# Altium PCB PCB.PcbDoc
Units mil, origin at the board's own origin, x right, y up, seen from the top; angles counter-clockwise.
Board outline 3700 x 3940 mil, 4 copper layers (Top Layer, Signal Layer 1, Signal Layer 2, Bottom Layer), stack 30.634 mil thick; 58 components, 40 nets, 306 pads, 93 vias.
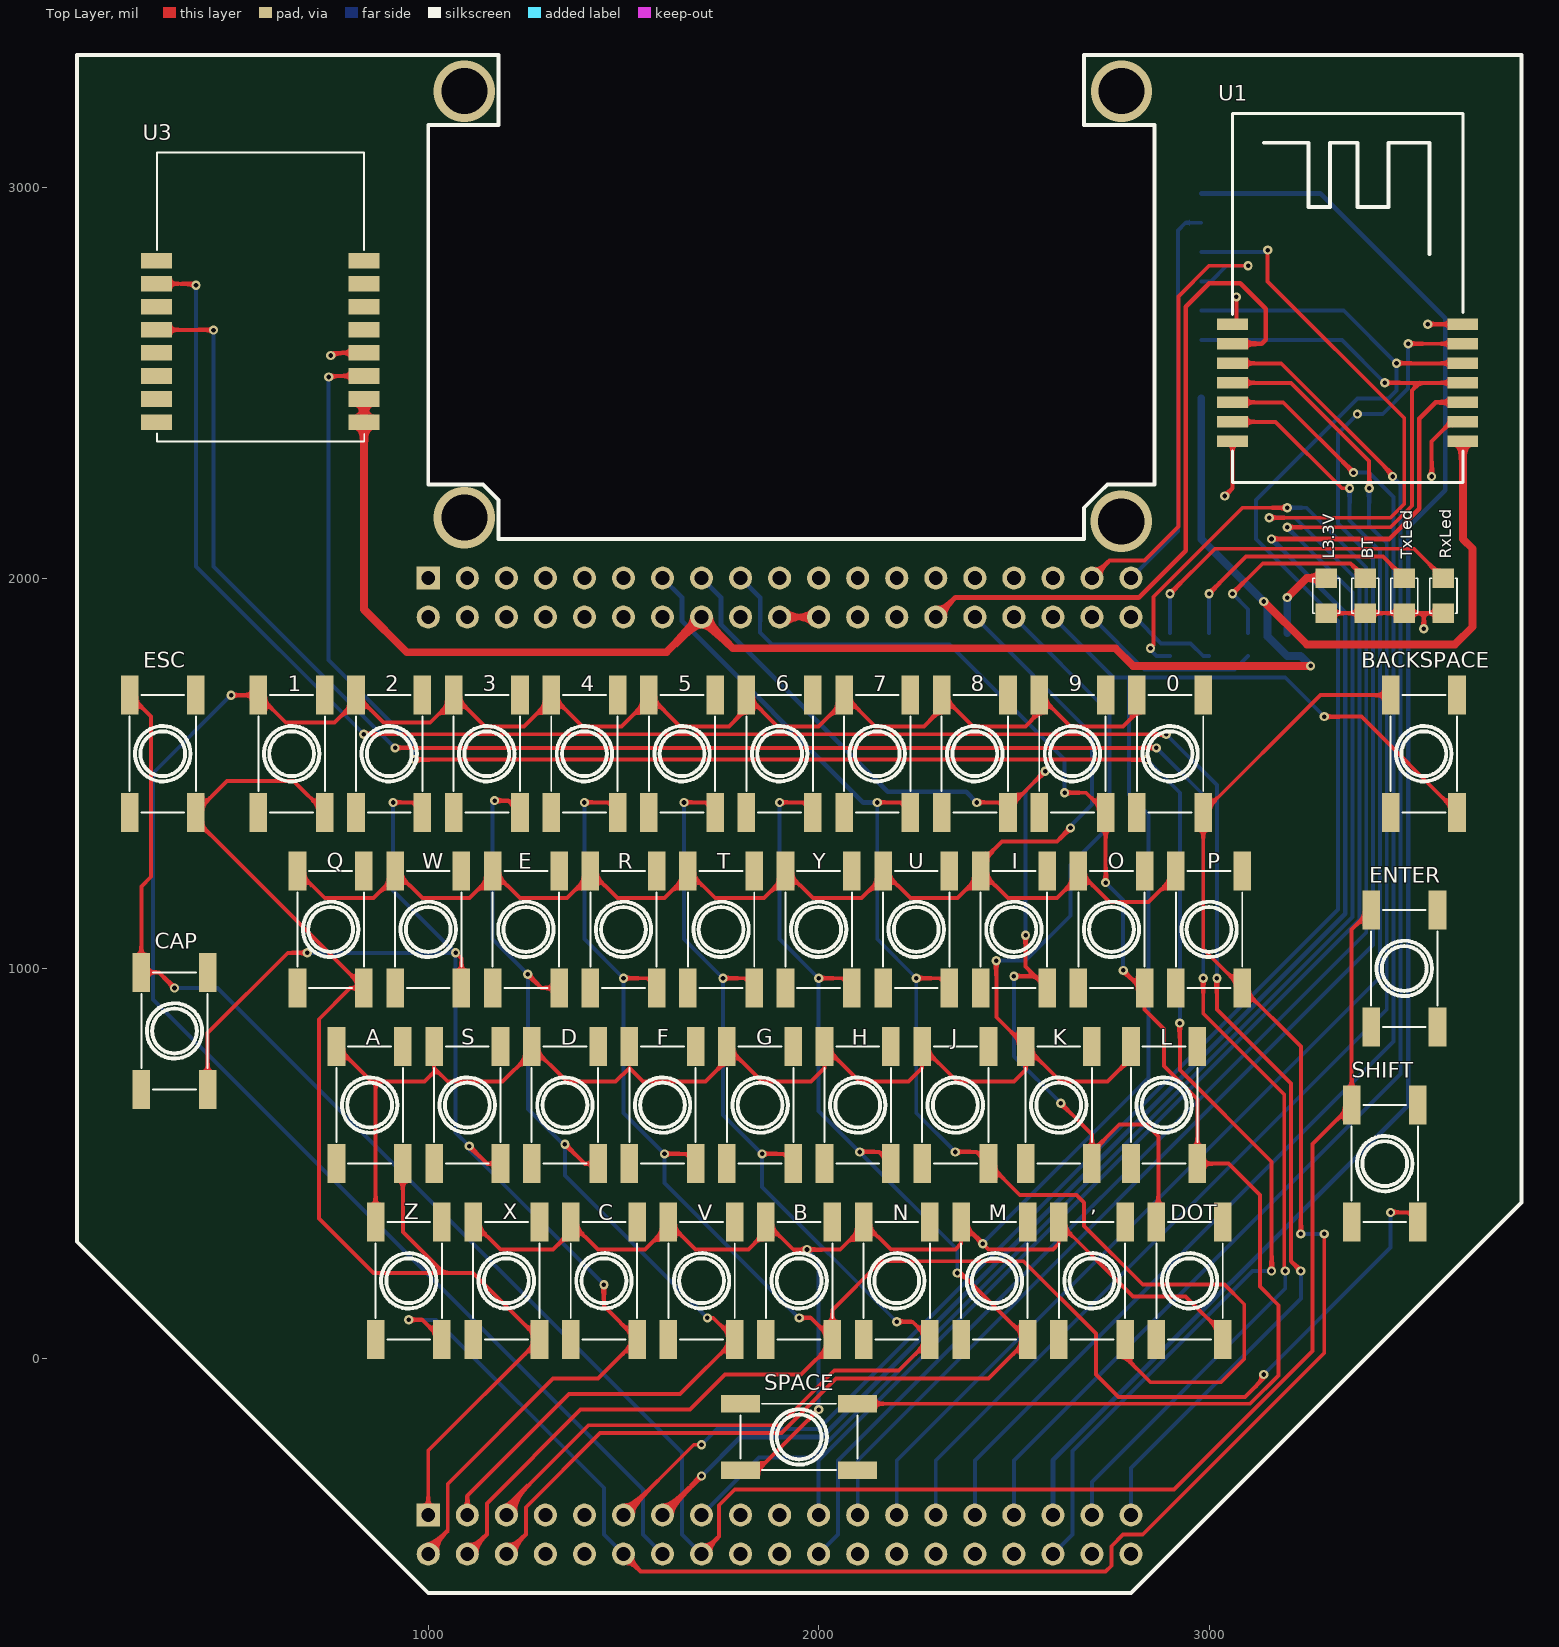
[diagram p0: Top Layer view]
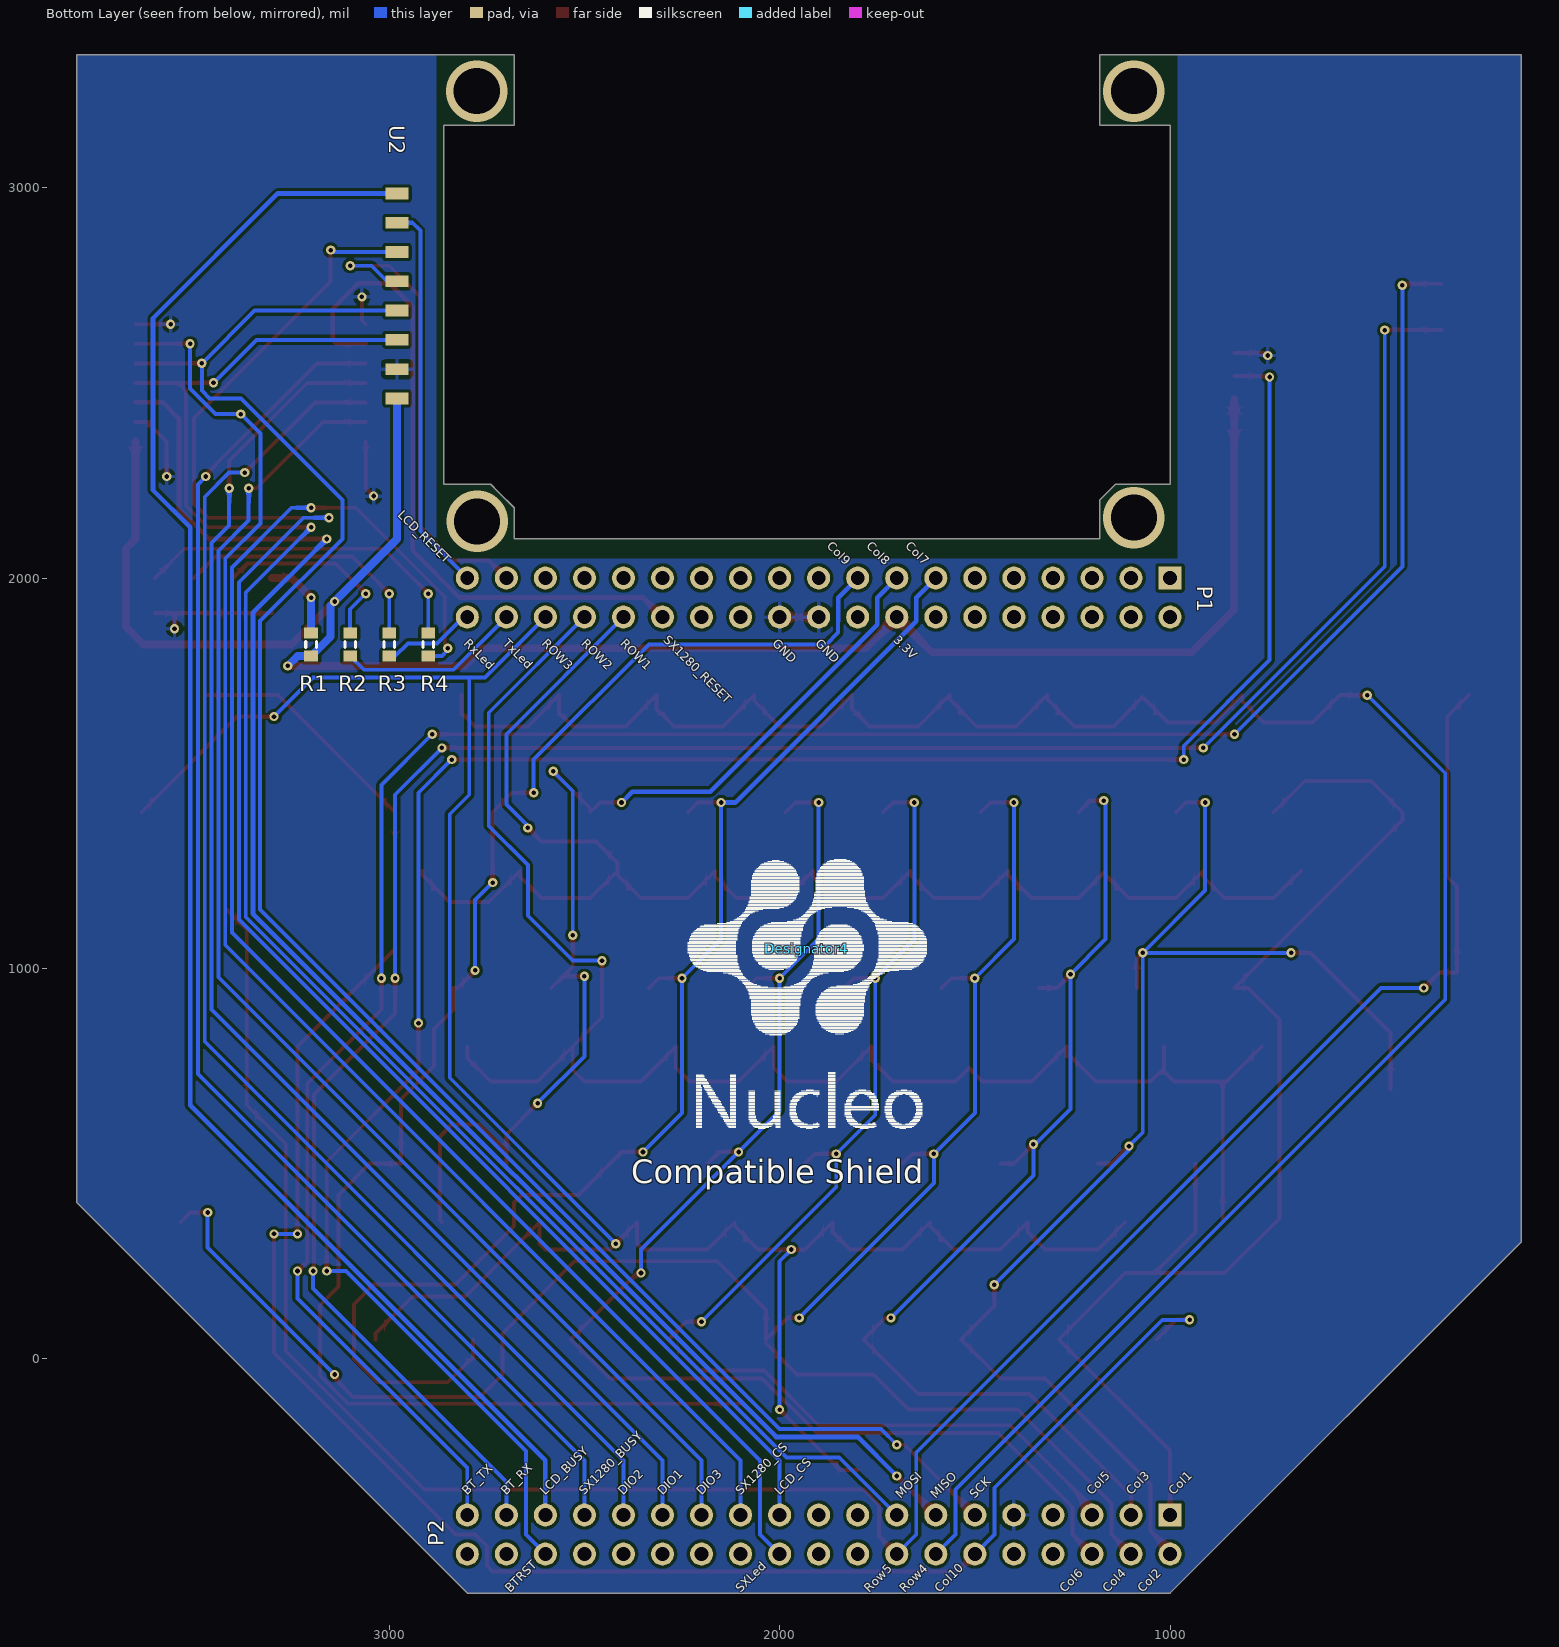
[diagram p1: Bottom Layer view, seen from below]

## Layer stack, top to bottom
Top Solder: solder mask 0.4, Solder Resist, Dk 3.5
Top Layer: signal copper 1.4
Dielectric 1: core 10, FR-4, Dk 4.2
Signal Layer 1: signal copper 1.417
Dielectric 3: prepreg 5, Dk 4.2
Signal Layer 2: signal copper 1.417
Dielectric 2: core 10, Dk 4.2
Bottom Layer: signal copper 1.4
Bottom Solder: solder mask 0.4, Solder Resist, Dk 3.5

## Board outline
100,300 1000,-600 2800,-600 3800,400 3800,3340 2680,3340 2680,3160 2860,3160 2860,2240 2740,2240 2720,2220 2680,2180 2680,2100 1180,2100 1180,2200 1140,2240 1000,2240 1000,3160 1180,3160 1180,3340 100,3340

## Design rules (kind name [scope] priority, off if disabled: settings)
Clearance [All] p1: gap=7.5 ignorepadtopadclearanceinfootprint=FALSE except(0: Arc-Hole Track-Hole SMDPad-Hole THPad-Hole Via-Hole Fill-Hole Poly-Hole Region-Hole Text-Hole)
PolygonConnect [All] p1: connectstyle=Relief reliefconductorwidth=10 reliefentries=4 polygonreliefangle="90 Angle" airgapwidth=10
RoutingVias [All] p1: holewidth=11.81 width=50 viastyle="Through Hole" minholewidth=11.81 minwidth=17.72 maxholewidth=11.81 maxwidth=23.62
SolderMaskExpansion [All] p1: expansion=4
Width [All] p1: maxlimit=30 minlimit=8 preferedwidth=10 minimp=50.000000 maximp=50.000000 favimp=50.000000
30 further rules are at their usual default settings.

## Components (designator, comment, footprint, x,y, rotation, side; value= is the part's Value field where it differs from the comment)
0 "SW" "Button 4 pins" 2900,1550 r90 top value="Button chip 4 pin"
1 "SW" "Button 4 pins" 650,1550 r90 top value="Button chip 4 pin"
2 "SW" "Button 4 pins" 900,1550 r90 top value="Button chip 4 pin"
3 "SW" "Button 4 pins" 1150,1550 r90 top value="Button chip 4 pin"
4 "SW" "Button 4 pins" 1400,1550 r90 top value="Button chip 4 pin"
5 "SW" "Button 4 pins" 1650,1550 r90 top value="Button chip 4 pin"
6 "SW" "Button 4 pins" 1900,1550 r90 top value="Button chip 4 pin"
7 "SW" "Button 4 pins" 2150,1550 r90 top value="Button chip 4 pin"
8 "SW" "Button 4 pins" 2400,1550 r90 top value="Button chip 4 pin"
9 "SW" "Button 4 pins" 2650,1550 r90 top value="Button chip 4 pin"
, "SW" "Button 4 pins" 2700,200 r90 top value="Button chip 4 pin"
A "SW" "Button 4 pins" 850,650 r90 top value="Button chip 4 pin"
B "SW" "Button 4 pins" 1950,200 r90 top value="Button chip 4 pin"
BACKSPACE "SW" "Button 4 pins" 3550,1550 r270 top value="Button chip 4 pin"
BT "LED SMD" SM-LED-0805-Blue 3400,2000 r270 top
C "SW" "Button 4 pins" 1450,200 r90 top value="Button chip 4 pin"
CAP "SW" "Button 4 pins" 350,840 r90 top value="Button chip 4 pin"
D "SW" "Button 4 pins" 1350,650 r90 top value="Button chip 4 pin"
Designator4 "Comment" "NUCLEO_black 2cm" 1930,1050 r180 bottom
DOT "SW" "Button 4 pins" 2950,200 r270 top value="Button chip 4 pin"
E "SW" "Button 4 pins" 1250,1100 r90 top value="Button chip 4 pin"
ENTER "SW" "Button 4 pins" 3500,1000 r90 top value="Button chip 4 pin"
ESC "SW" "Button 4 pins" 320,1550 r90 top value="Button chip 4 pin"
F "SW" "Button 4 pins" 1600,650 r90 top value="Button chip 4 pin"
G "SW" "Button 4 pins" 1850,650 r90 top value="Button chip 4 pin"
H "SW" "Button 4 pins" 2100,650 r90 top value="Button chip 4 pin"
I "SW" "Button 4 pins" 2500,1100 r90 top value="Button chip 4 pin"
J "SW" "Button 4 pins" 2350,650 r90 top value="Button chip 4 pin"
K "SW" "Button 4 pins" 2615,650 r90 top value="Button chip 4 pin"
L "SW" "Button 4 pins" 2885,650 r90 top value="Button chip 4 pin"
L3.3V "LED SMD" SM-LED-0805-Blue 3300,2000 r270 top
M "SW" "Button 4 pins" 2450,200 r90 top value="Button chip 4 pin"
N "SW" "Button 4 pins" 2200,200 r90 top value="Button chip 4 pin"
O "SW" "Button 4 pins" 2750,1100 r90 top value="Button chip 4 pin"
P "SW" "Button 4 pins" 3000,1100 r90 top value="Button chip 4 pin"
P1 "Header 19X2" HDR2X19 1000,2000 r0 bottom
P2 "Header 19X2" HDR2X19 1000,-400 r0 bottom
Q "SW" "Button 4 pins" 750,1100 r90 top value="Button chip 4 pin"
R "SW" "Button 4 pins" 1500,1100 r90 top value="Button chip 4 pin"
R1 "Res3" J1-0603 3200,1830 r270 bottom value=330
R2 "Res3" J1-0603 3100,1829.53 r270 bottom value=330
R3 "Res3" J1-0603 3000,1829.53 r270 bottom value=330
R4 "Res3" J1-0603 2900,1829.53 r270 bottom value=330
RxLed "LED SMD" SM-LED-0805-Blue 3600,2000 r270 top
S "SW" "Button 4 pins" 1100,650 r90 top value="Button chip 4 pin"
SHIFT "SW" "Button 4 pins" 3450,500 r90 top value="Button chip 4 pin"
SPACE "SW" "Button 4 pins" 1950,-200 r180 top value="Button chip 4 pin"
T "SW" "Button 4 pins" 1750,1100 r90 top value="Button chip 4 pin"
TxLed "LED SMD" SM-LED-0805-Blue 3500,2000 r270 top
U "SW" "Button 4 pins" 2250,1100 r90 top value="Button chip 4 pin"
U1 "SX1280 Module" "SX1280 Module" 3350,2800 r0 top
U2 "EInk LCD Module" EInk_Module 1945,2665 r0 top
U3 "Bluetooth HM-13" "Bluetooth HM-13" 560,2990 r0 top
V "SW" "Button 4 pins" 1700,200 r90 top value="Button chip 4 pin"
W "SW" "Button 4 pins" 1000,1100 r90 top value="Button chip 4 pin"
X "SW" "Button 4 pins" 1200,200 r90 top value="Button chip 4 pin"
Y "SW" "Button 4 pins" 2000,1100 r90 top value="Button chip 4 pin"
Z "SW" "Button 4 pins" 950,200 r90 top value="Button chip 4 pin"

## Footprints (in the part's own frame and the unit in brackets; to place one, negate y for a bottom-side part, rotate by r counter-clockwise, add the part's x,y. Pads: shape width x height; smd on the part's side, far side on the other; paste and mask are expansions set on the pad)
"Bluetooth HM-13" [mil]
  rect 80x40 smd: 1(-255.91,-177.17) 2(-255.91,-236.22) 3(-255.91,-295.28) 4(-255.91,-354.33) 5(-255.91,-413.39) 6(-255.91,-472.44) 7(-255.91,-531.5) 8(-255.91,-590.55) 9(275.59,-590.55) 10(275.59,-531.5) 11(275.59,-472.44) 12(275.59,-413.39) 13(275.59,-354.33) 14(275.59,-295.28) 15(275.59,-236.22) 16(275.59,-177.17)
  silkscreen extent -255,-640 276,100
"Button 4 pins" [mil]
  rect 100x45 smd: 1(-150,85) 2(150,85) 3(-150,-85) 4(150,-85)
  silkscreen extent -150,-85 150,85
EInk_Module [mil]
  rect 60x30 smd far side: 1(1035,-205) 2(1035,-130) 3(1035,-55) 4(1035,20) 5(1035,95) 6(1035,170) 7(1035,245) 8(1035,320)
HDR2X19 [mm] "Connector; Header; 19x2 Position"
  rect 1.5x1.5 hole 0.9: 1(0,0)
  round 1.5 hole 0.9: 2(0,2.54) 3(2.54,0) 4(2.54,2.54) 5(5.08,0) 6(5.08,2.54) 7(7.62,0) 8(7.62,2.54) 9(10.16,0) 10(10.16,2.54) 11(12.7,0) 12(12.7,2.54) 13(15.24,0) 14(15.24,2.54) 15(17.78,0) 16(17.78,2.54) 17(20.32,0) 18(20.32,2.54) 19(22.86,0) 20(22.86,2.54) 21(25.4,0) 22(25.4,2.54) 23(27.94,0) 24(27.94,2.54) 25(30.48,0) 26(30.48,2.54) 27(33.02,0) 28(33.02,2.54) 29(35.56,0) 30(35.56,2.54) 31(38.1,0) 32(38.1,2.54) 33(40.64,0) 34(40.64,2.54) 35(43.18,0) 36(43.18,2.54) 37(45.72,0) 38(45.72,2.54)
J1-0603 [mm] "Chip Resistor, Body 1.6x0.8mm, IPC High Density"
  rect 0.7x0.9 smd: 1(-0.75,0) 2(0.75,0)
  silkscreen extent -0.2,-0.35 0.2,0.35, body extent -0.85,-0.48 0.85,0.48, height 0.9
"NUCLEO_black 2cm" [mil]
  silkscreen extent -305,-461 307,229
SM-LED-0805-Blue [mil]
  rect 50x55 smd: 1(0,0) 2(90,0)
  silkscreen extent 0,-35 90,35, body extent 5,-25 85,25, height 43
"SX1280 Module" [mm]
  rect 2x0.75 smd: 1(-7.366,-3.81) 2(-7.366,-5.08) 3(-7.366,-6.35) 4(-7.366,-7.62) 5(-7.366,-8.89) 6(-7.366,-10.16) 7(-7.366,-11.43) 8(7.62,-11.43) 9(7.62,-10.16) 10(7.62,-8.89) 11(7.62,-7.62) 12(7.62,-6.35) 13(7.62,-5.08) 14(7.62,-3.81)
  silkscreen extent -7.37,-14.1 7.62,9.9

## Part data
0 1 2 3 4 5 6 7 8 9 , A B BACKSPACE C CAP D DOT E ENTER ESC F G H I J K L M N O P Q R S SHIFT SPACE T U V W X Y Z: library part SW4, "Switch button 4 pin"
BT L3.3V RxLed TxLed: library part LED-SMD-0805
P1 P2: "Header, 19-Pin, Dual row", LatestRevisionDate=17-Jul-2002, LatestRevisionNote="Re-released for DXP Platform.", Publisher="Altium Limited"
R1 R2 R3 R4: "Resistor", LatestRevisionDate=29-May-2009, LatestRevisionNote="IPC-7351 Footprint Added.", PackageDescription="Chip Resistor", PackageReference=J1-0603, Published=8-Jun-2000, Publisher="Altium Limited"
U2: library part "E-Ink LCD"

## Via types
v1: diameter 23.62, hole 11.81, Top Layer to Bottom Layer, 89 vias
v2: diameter 157.48, hole 118.11, Top Layer to Bottom Layer, 4 vias

## Nets (pads, with @x,y where several pads share a name; then routed paths per layer and width w, separated by ;. In a path a pad name is that pad's centre, name@x,y a point inside that pad or via, vN(x,y) a via of type N, cw(c..) or ccw(c..) an arc to the next point about the centre after c; other vN are vias at no path point)
3.3V: P1.16 R1.2 U1.8 U2.1 U3.9 U3.10 | length 5003.6
  Top Layer w20: U3.10 U3.9 835.59,1919.41 945,1810 1610,1810 P1.16 1780,1820 2760,1820 2805,1775 v1(3260,1775) ; v1(3140,1940) 3250,1830 3630,1830 3675,1875 3675,2075 3650,2100 U1.8
  Bottom Layer w20: U2.1 2980,2100 v1(3140,1940) 3150,1930 3150,1850.47 R1.2 3234.53,1800.47 v1(3260,1775)
BT_RESET: P2.34 U3.11 | length 5465.9
  Top Layer w10: v1(745,2515) 747.56,2517.56 U3.11 ; v1(965,1535) v1(2840,1535) ; v1(2925,860) 2925,740 3160,505 v1(3160,225)
  Bottom Layer w10: v1(745,2515) 745,1790 965,1570 v1(965,1535) ; P2.34 2650,-450 2650,-236.16 3111.16,225 v1(3160,225) ; v1(2840,1535) 2925,1450 v1(2925,860)
BT_RX: P2.35 U3.4 | length 5665.5
  Top Layer w10: U3.4 449.33,2635.67 v1(450,2635) ; v1(915,1565) v1(2865,1565) ; v1(2985,975) 2985,885 3192.5,677.5 3192.5,227.5 v1(3195,225)
  Bottom Layer w10: v1(450,2635) 450,2030 v1(915,1565) ; P2.35 2700,-315 3195,180 v1(3195,225) ; v1(2865,1565) 2985,1445 v1(2985,975)
BT_TX: P2.37 U3.2 | length 5808.7
  Top Layer w10: U3.2 401.22,2753.78 v1(405,2750) ; v1(835,1600) v1(2890,1600) ; v1(3020,975) 3020,895 3210,705 3210,250 v1(3235,225)
  Bottom Layer w10: v1(405,2750) 405,2030 v1(835,1600) ; P2.37 2800,-280 3235,155 v1(3235,225) ; v1(2890,1600) 3020,1470 v1(3020,975)
COL1: 1.3 A.3 ESC.3 P2.1 Q.3 X.3 | length 3267.5
  Top Layer w10: 1.3 655,1480 485,1480 ESC.3 405,1380 Q.3 800,950 720,870 720,360 860,220 1040,220 ; A.3 935,325 1040,220 ; P2.1 1000,-235 X.3 1115,220 1040,220
COL2: 2.3 C.3 CAP.3 P2.2 S.3 W.3 | length 3618
  Top Layer w10: CAP.3 435,835 640,1040 v1(690,1040) ; v1(910,1425) 960,1425 2.3 ; P2.2 1000,-490 1050,-440 1050,-320 1320,-50 1435,-50 C.3 1450,135 v1(1450,190) ; v1(1070,1040) 1085,1025 W.3 ; v1(1105,545) 1150,500 S.3
  Bottom Layer w10: v1(690,1040) v1(1070,1040) ; v1(910,1425) 910,1200 v1(1070,1040) ; v1(1450,190) 1105,535 v1(1105,545) 1070,580 v1(1070,1040)
COL3: 3.3 D.3 E.3 P2.3 V.3 | length 2828.9
  Top Layer w10: P2.3 1100,-350 1360,-90 1645,-90 V.3 1730,105 v1(1715,105) ; v1(1170,1430) 1205,1430 3.3 ; v1(1255,985) 1290,950 E.3 ; v1(1350,550) 1400,500 D.3
  Bottom Layer w10: v1(1170,1430) 1165,1425 1165,1075 v1(1255,985) 1255,640 1345,550 v1(1350,550) 1350,470 v1(1715,105)
COL4: 4.3 B.3 F.3 P2.4 R.3 SHIFT.3 | length 5239.1
  Top Layer w10: P2.4 1150,-450 1150,-370 1390,-130 1670,-130 1760,-40 1955,-40 B.3@2035,40 ; v1(1400,1425) 1460,1425 4.3 ; v1(1500,975) 1560,975 R.3 ; v1(1605,525) 1660,525 F.3 ; v1(1950,105) 1980,105 B.3 2035,125 2160,250 2525,250 2710,65 2710,-40 2767.5,-97.5 3092.5,-97.5 3140,-50 v1(3140,-40) ; v1(3465,375) 3510,375 SHIFT.3
  Bottom Layer w10: v1(1400,1425) 1400,1075 v1(1500,975) 1500,630 v1(1605,525) 1605,450 v1(1950,105) ; v1(3140,-40) 3465,285 v1(3465,375)
COL5: 5.3 G.3 N.3 P2.5 T.3 | length 3213.6
  Top Layer w10: P2.5 1200,-380 1410,-170 1900,-170 2040,-30 2205,-30 N.3 2240,95 v1(2200,95) ; v1(1655,1425) 1710,1425 5.3 ; v1(1755,975) 1810,975 T.3 ; v1(1855,525) 1910,525 G.3
  Bottom Layer w10: v1(1655,1425) 1655,1075 v1(1755,975) 1755,625 v1(1855,525) 1855,440 v1(2200,95)
COL6: 6.3 H.3 M.3 P2.6 Y.3 | length 3530.8
  Top Layer w10: P2.6 1250,-450 1250,-380 1440,-190 1904.75,-190 2044.75,-50 2435,-50 M.3 2365,220 v1(2355,220) ; v1(1900,1425) 1960,1425 6.3 ; v1(2000,975) 2060,975 Y.3 ; v1(2105,530) 2155,530 H.3
  Bottom Layer w10: v1(1900,1425) 1900,1075 v1(2000,975) 2000,635 v1(2105,530) 2355,280 v1(2355,220)
COL7: 7.3 ,.3 J.3 P1.13 U.3 | length 3470.8
  Top Layer w10: v1(2150,1425) 2210,1425 7.3 ; v1(2250,975) 2310,975 U.3 ; v1(2350,530) 2405,530 J.3 2515,420 2660,420 2680,400 2680,340 2830,190 3040,190 3090,140 3090,0 3030,-60 2850,-60 2785,5 2785,50
  Bottom Layer w10: v1(2150,1425) 2150,1075 v1(2250,975) 2250,630 v1(2350,530)
  Bottom Layer w12: P1.13 1650,1950 1650,1889.15 2114.15,1425 v1(2150,1425)
COL8: 8.3 DOT.3 I.3 K.3 P1.15 | length 2868.8
  Top Layer w10: v1(2405,1425) 2460,1425 8.3 2485,1410.18 2579.82,1505 v1(2580,1505) ; v1(2500,980) 2555,980 ; v1(2530,1085) 2530,1005 2555,980 ; I.3 2555,980 ; v1(2620,655) 2700,575 K.3@2700,530 ; K.3 K.3@2700,530 ; DOT.3 2870,355 2870,570 2840,600 2770,600 K.3@2700,530
  Bottom Layer w10: v1(2500,980) 2500,775 v1(2620,655) ; v1(2530,1085) 2530,1455 v1(2580,1505)
  Bottom Layer w12: P1.15 1750,1950 1750,1880 2177.5,1452.5 2377.5,1452.5 v1(2405,1425)
COL9: 9.3 L.3 O.3 P1.17 SPACE.3 | length 4072.3
  Top Layer w10: SPACE.3 3105.25,-115 3177.63,-42.63 3177.63,137.37 3130,185 3130,420 3050,500 L.3 2970,665 2885,750 2885,845 2835,895 O.3 2825,950 v1(2780,995) ; v1(2630,1450) 2685,1450 9.3 v1(2735,1220)
  Bottom Layer w10: 1850,1890 1850,1860 1880,1830 2335,1830 2630,1535 v1(2630,1450) ; v1(2735,1220) 2780,1175 v1(2780,995)
  Bottom Layer w12: P1.17 1850,1950 1850,1890
COL10: 0.3 BACKSPACE.3 P2.12 P.3 Z.3 | length 5202.2
  Top Layer w10: v1(950,100) 985,100 Z.3 ; P2.12 1545,-545 2735,-545 2750,-530 2750,-480 2780,-450 2830,-450 3295,15 v1(3295,320) ; v1(3235,320) 3235,800 P.3 2985,1050 0.3 3285,1700 BACKSPACE.3
  Bottom Layer w10: v1(950,100) 1020,100 1450,-330 1450,-450 P2.12 ; v1(3235,320) v1(3295,320)
DIO1: P2.27 U1.4 | length 3629.9
  Top Layer w10: U1.4 3210,2500 3410,2300 v1(3410,2230)
  Bottom Layer w10: P2.27 2300,-260 3455,895 3455,2090 3410,2135 v1(3410,2230)
DIO2: P2.29 U1.5 | length 3564.7
  Top Layer w10: U1.5 3190,2450 v1(3370,2270)
  Bottom Layer w10: P2.29 2400,-260 3472.5,812.5 3472.5,2207.5 3410,2270 v1(3370,2270)
DIO3: P2.25 U1.6 | length 3545.1
  Top Layer w10: U1.6 3170,2400 3340,2230 v1(3360,2230)
  Bottom Layer w10: P2.25 2200,-260 3437.5,977.5 3437.5,2070 3360,2147.5 v1(3360,2230)
GND: BT.2 L3.3V.2 P1.20 P1.22 P2.9 RxLed.2 TxLed.2 U1.1 U1.7 U1.9 U1.14 U2.2 U3.12 | length 1031.5
  Top Layer w10: v1(750,2570) 756.61,2576.61 U3.12 ; P1.20 P1.22 ; v1(3040,2210) 3060,2230 U1.7 ; U1.1 3070,2660 v1(3070,2720) ; L3.3V.2 BT.2 TxLed.2 3550,1910 ; v1(3550,1870) 3550,1910 ; v1(3560,2650) U1.14 ; v1(3570,2260) 3570,2350 3620,2400 U1.9 ; RxLed.2 3550,1910
LCD_BUSY: P2.33 U2.8 | length 4238.8
  Bottom Layer w12: P2.33 2600,-260 3510,650 3510,2130 3605,2225 3605,2665 3285,2985 U2.8
LCD_CE0: P1.35 U2.5 | length 1213.6
  Top Layer w10: P1.35 2745,2045 2835,2045 2921.5,2131.5 2921.5,2721.5 3000,2800 v1(3100,2800)
  Bottom Layer w10: U2.5 3005,2760 3045,2800 v1(3100,2800)
LCD_CS: P2.21 U2.6 | length 4589.5
  Top Layer w10: v1(3150,2840) 3150,2760 3500,2410 3500,2190 3464.31,2154.31 v1(3154.31,2154.31)
  Bottom Layer w10: P2.21 2000,-260 3385,1125 3385,1989.31 3220,2154.31 v1(3154.31,2154.31) ; U2.6 3145,2835 v1(3150,2840)
LCD_RESET: P1.37 U2.7 | length 1008
  Bottom Layer w10: P1.37 2920,2120 2920,2890 2940,2910 U2.7
MISO: P2.13 U1.10 | length 4195.5
  Top Layer w12: P2.13 v1(1700,-300) ; v1(3160,2100) 3460.91,2100 3538.5,2177.59 3538.5,2408.5 3580,2450 U1.10
  Bottom Layer w12: v1(1700,-300) 1800,-200 2009.09,-200 3349,1139.91 3349,1911 v1(3160,2100)
MOSI: P2.15 U1.11 U2.3 | length 4750.8
  Top Layer w10: v1(3200,2130) 3464.75,2130 3520,2185.25 3520,2480 3540,2500 ; v1(3450,2500) 3540,2500 ; U1.11 3540,2500
  Bottom Layer w10: P2.15 1847.25,-252.75 1982.5,-252.75 3367.5,1132.25 3367.5,1962.5 v1(3200,2130) ; U2.3 3340,2610 v1(3450,2500)
NetBT_1: BT.1 R2.1 | length 505.1
  Top Layer w10: v1(3060,1960) 3137.5,2037.5 3362.5,2037.5 BT.1
  Bottom Layer w10: v1(3060,1960) 3100,1920 R2.1
NetL3.3V_1: L3.3V.1 R1.1 | length 211.2
  Top Layer w20: v1(3200,1950) 3250,2000 L3.3V.1
  Bottom Layer w20: R1.1 v1(3200,1950)
NetR3_1: R3.1 TxLed.1 | length 663.1
  Top Layer w10: v1(3000,1960) 3095,2055 3445,2055 TxLed.1
  Bottom Layer w10: R3.1 v1(3000,1960)
NetR4_1: R4.1 RxLed.1 | length 879.6
  Top Layer w10: v1(2900,1960) 3015,2075 3525,2075 RxLed.1
  Bottom Layer w10: R4.1 v1(2900,1960)
ROW1: E.2 I.2 O.2 P1.30 P.2 Q.2 R.2 T.2 U.2 W.2 Y.2 | length 3819.5
  Top Layer w10: Q.2 735,1180 860,1180 915,1235 W.2 985,1180 1105.18,1180 1165,1239.82 E.2 1235,1180 1355.18,1180 1415,1239.82 R.2 1485,1180 1605.18,1180 1665,1239.82 T.2 1735,1180 1860,1180 1915,1235 Y.2 1985,1180 2110,1180 2165,1235 U.2 2235,1180 2355.18,1180 2415,1239.82 I.2 ; v1(2645,1360) 2610,1325 2470,1325 2415,1270 I.2 ; P.2 2915,1239.82 2845.18,1170 2745,1170 O.2 2665,1235 2610,1180 2485,1180 I.2
  Bottom Layer w10: P1.30 2700,1600 2700,1420 2645,1365 v1(2645,1360)
ROW2: A.2 D.2 F.2 G.2 H.2 J.2 K.2 L.2 P1.32 S.2 Z.2 | length 4507.2
  Top Layer w10: A.2 855,710 865,710 ; Z.2 865,710 ; S.2 1015,745 1020,740 ; v1(2455,1020) 2455,875 K.2 ; L.2 2800,770 2740,710 2620,710 K.2 ; 865,710 990,710 1020,740 ; 1020,740 1050,710 1190,710 1255,775 1265,775 D.2 1355,710 1480,710 1515,745 1550,710 1710,710 1765,765 G.2 1855,710 1980,710 2015,745 H.2 2105,710 2230,710 2265,745 J.2 2355,710 2500,710 2530,740 K.2
  Bottom Layer w10: v1(2455,1020) 2530,1020 2645,1135 2645,1265 2745,1365 2745,1655 P1.32
ROW3: ,.2 B.2 BACKSPACE.2 C.2 DOT.2 M.2 N.2 P1.34 SPACE.2 V.2 X.2 | length 6082.1
  Top Layer w10: X.2 1185,280 1320,280 1365,325 C.2 1435,280 1555.18,280 1615,339.82 V.2 1685,280 1820,280 1865,325 B.2 1935,280 v1(1970,280) 2055.18,280 2115,339.82 N.2 2185,280 2350,280 2365,295 M.2 v1(2420,295) 2435,280 2600,280 2615,295 2615,350 2805,160 2940,160 3035,65 DOT.2 ; SPACE.2 1845,-285 v1(2000,-130) ; v1(3295,1645) 3390,1645 BACKSPACE.2
  Bottom Layer w10: v1(1970,280) 2000,250 v1(2000,-130) ; v1(2420,295) 2845,720 2845,1395 2795,1445 2795,1745 ; P1.34 2755,1745 2795,1745 ; v1(3295,1645) 3195,1745 2795,1745
ROW4: 0.2 1.2 2.2 3.2 4.2 5.2 6.2 7.2 8.2 9.2 P2.14 | length 5835.1
  Top Layer w10: v1(495,1700) 1.2 635,1630 760,1630 815,1685 2.2 885,1630 1005.18,1630 3.2@1065,1689.82 ; 3.2@1070.09,1694.91 1145,1620 1245.18,1620 1315,1689.82 4.2 1395,1620 1495.18,1620 1565,1689.82 5.2 1645,1620 1770,1620 1815,1665 6.2 1895,1620 2000,1620 2065,1685 7.2 2145,1620 2270,1620 2315,1665 8.2 2395,1620 2530,1620 2565,1655 9.2 2645,1620 2780,1620 2815,1655 0.2
  Bottom Layer w10: v1(495,1700) 295,1500 295,920 1550,-335 1550,-450 P2.14
ROW5: CAP.2 ENTER.2 ESC.2 P2.16 SHIFT.2 | length 5937.7
  Top Layer w10: ESC.2 290,1645 290,1235 265,1210 CAP.2 310,990 v1(350,950) ; P2.16 1745,-455 1745,-375 1785,-335 2910,-335 3265,20 3265,550 SHIFT.2 3365,1100 ENTER.2
  Bottom Layer w10: v1(350,950) 460,950 1650,-240 1650,-450 P2.16
RxLed: P1.38 R3.2 | length 241.4
  Bottom Layer w10: P1.38 2809.88,1900 2877.11,1832.78 2952.22,1832.78 2985,1800 R3.2
SCK: P2.11 U1.12 U2.4 | length 4881.3
  Top Layer w10: P2.11 1680,-220 v1(1700,-220) ; v1(3480,2550) U1.12
  Bottom Layer w10: v1(1700,-220) 1740,-180 2000,-180 3330.5,1150.5 3330.5,1889.5 3120,2100 3120,2200 3380,2460 3460,2460 3480,2480 v1(3480,2550) 3345,2685 U2.4
SX1280_BUSY: P2.31 U1.3 | length 3611.3
  Top Layer w10: U1.3 3184.75,2550 3470,2264.75 v1(3470,2260)
  Bottom Layer w10: P2.31 2500,-260 3490,730 3490,2240 v1(3470,2260)
SX1280_CS: P2.23 U1.13 | length 3836.5
  Top Layer w10: v1(3510,2600) U1.13
  Bottom Layer w10: P2.23 2100,-260 3420,1060 3420,2050 3330,2140 3330,2370 v1(3380,2420) 3444.75,2420 3510,2485.25 v1(3510,2600)
SX1280_RESET: P1.28 U1.2 | length 1761.3
  Top Layer w12: P1.28 2350,1950 2820,1950 2940,2070 2940,2695 3000,2755 3080,2755 3145,2690 3145,2610 3135,2600 U1.2
SXLed: P2.22 R4.2 | length 4007.3
  Top Layer w10: v1(2850,1820) 2857.81,1827.81 2857.81,1952.19 3085.62,2180 v1(3200,2180)
  Bottom Layer w10: P2.22 2050,-450 2050,-260 3402.5,1092.5 3402.5,2027.5 3250,2180 v1(3200,2180) ; v1(2850,1820) 2850,1815 2865,1800 R4.2
TxLed: P1.36 R2.2 | length 470.4
  Bottom Layer w10: P1.36 2835,1765 3065,1765 R2.2
pads on no net: 0.1 0.4 1.1 1.4 2.1 2.4 3.1 3.4 4.1 4.4 5.1 5.4 6.1 6.4 7.1 7.4 8.1 8.4 9.1 9.4 ,.1 ,.4 A.1 A.4 B.1 B.4 BACKSPACE.1 BACKSPACE.4 C.1 C.4 CAP.1 CAP.4 D.1 D.4 DOT.1 DOT.4 E.1 E.4 ENTER.1 ENTER.3 ENTER.4 ESC.1 ESC.4 F.1 F.4 G.1 G.4 H.1 H.4 I.1 I.4 J.1 J.4 K.1 K.4 L.1 L.4 M.1 M.4 N.1 N.4 O.1 O.4 P1.1 P1.2 P1.3 P1.4 P1.5 P1.6 P1.7 P1.8 P1.9 P1.10 P1.11 P1.12 P1.14 P1.18 P1.19 P1.21 P1.23 P1.24 P1.25 P1.26 P1.27 P1.29 P1.31 P1.33 P2.7 P2.8 P2.10 P2.17 P2.18 P2.19 P2.20 P2.24 P2.26 P2.28 P2.30 P2.32 P2.36 P2.38 P.1 P.4 Q.1 Q.4 R.1 R.4 S.1 S.4 SHIFT.1 SHIFT.4 SPACE.1 SPACE.4 T.1 T.4 U3.1 U3.3 U3.5 U3.6 U3.7 U3.8 U3.13 U3.14 U3.15 U3.16 U.1 U.4 V.1 V.4 W.1 W.4 X.1 X.4 Y.1 Y.4 Z.1 Z.4
copper on no net:
  other v2: 2775,2145 1092.6,2154.65 1092.6,3247.17 2775.67,3247.17

## Polygon pours and split planes (outlines as drawn)
GND on Bottom Layer "Bottom Layer-No Net" (solid, remove dead copper, pour order 36): 100,3340 980,3340 980,2050 2880,2050 2880,3340 3800,3340 3800,400 2800,-600 1000,-600 100,300

## Silkscreen, mask and mechanical layers (free items; w line width, h text height)
Top Overlay:
  the board outline again, w10
Bottom Overlay:
  text "LCD_RESET" at 2980,2160 h22 r45
  text "Col7" at 1680,2080 h22 r45
  text "Col8" at 1780,2080 h22 r45
  text "Col9" at 1880,2080 h22 r45
  text "3.3V" at 1710,1840 h22 r45
  text "SX1280_RESET" at 2300,1840 h22 r45
  text "GND" at 1910,1830 h22 r45
  text "GND" at 2020,1830 h22 r45
  text "ROW1" at 2410,1830 h22 r45
  text "ROW2" at 2510,1830 h22 r45
  text "ROW3" at 2610,1830 h22 r45
  text "TxLed" at 2710,1830 h22 r45
  text "RxLed" at 2810,1830 h22 r45
  text "Compatible Shield" at 2380,450 h60
  text "Col1" at 990,-350 h22 r315
  text "Col3" at 1100,-350 h22 r315
  text "Col5" at 1200,-350 h22 r315
  text "LCD_CS" at 2000,-350 h22 r315
  text "SX1280_CS" at 2100,-350 h22 r315
  text "DIO3" at 2200,-350 h22 r315
  text "DIO1" at 2300,-350 h22 r315
  text "DIO2" at 2400,-350 h22 r315
  text "SX1280_BUSY" at 2500,-350 h22 r315
  text "LCD_BUSY" at 2600,-350 h22 r315
  text "BT_RX" at 2700,-350 h22 r315
  text "BT_TX" at 2800,-350 h22 r315
  text "SCK" at 1500,-360 h22 r315
  text "MISO" at 1600,-360 h22 r315
  text "MOSI" at 1690,-360 h22 r315
  text "Col2" at 1070,-600 h22 r315
  text "Col4" at 1160,-600 h22 r315
  text "Col6" at 1270,-600 h22 r315
  text "Col10" at 1590,-600 h22 r315
  text "Row4" at 1680,-600 h22 r315
  text "Row5" at 1770,-600 h22 r315
  text "SXLed" at 2100,-600 h22 r315
  text "BTRST" at 2690,-600 h22 r315

## Dimensions
90,3710 to 3810,3810 on Top Layer
-20,3340 to 40,-600 on Top Layer